# Altium PCB PCB1.PcbDoc
Units mm, origin at the board's own origin, x right, y up, seen from the top; angles counter-clockwise.
Board outline 70 x 80 mm, 2 copper layers (Top Layer, Bottom Layer); 18 components, 21 nets, 217 pads, 2 vias.
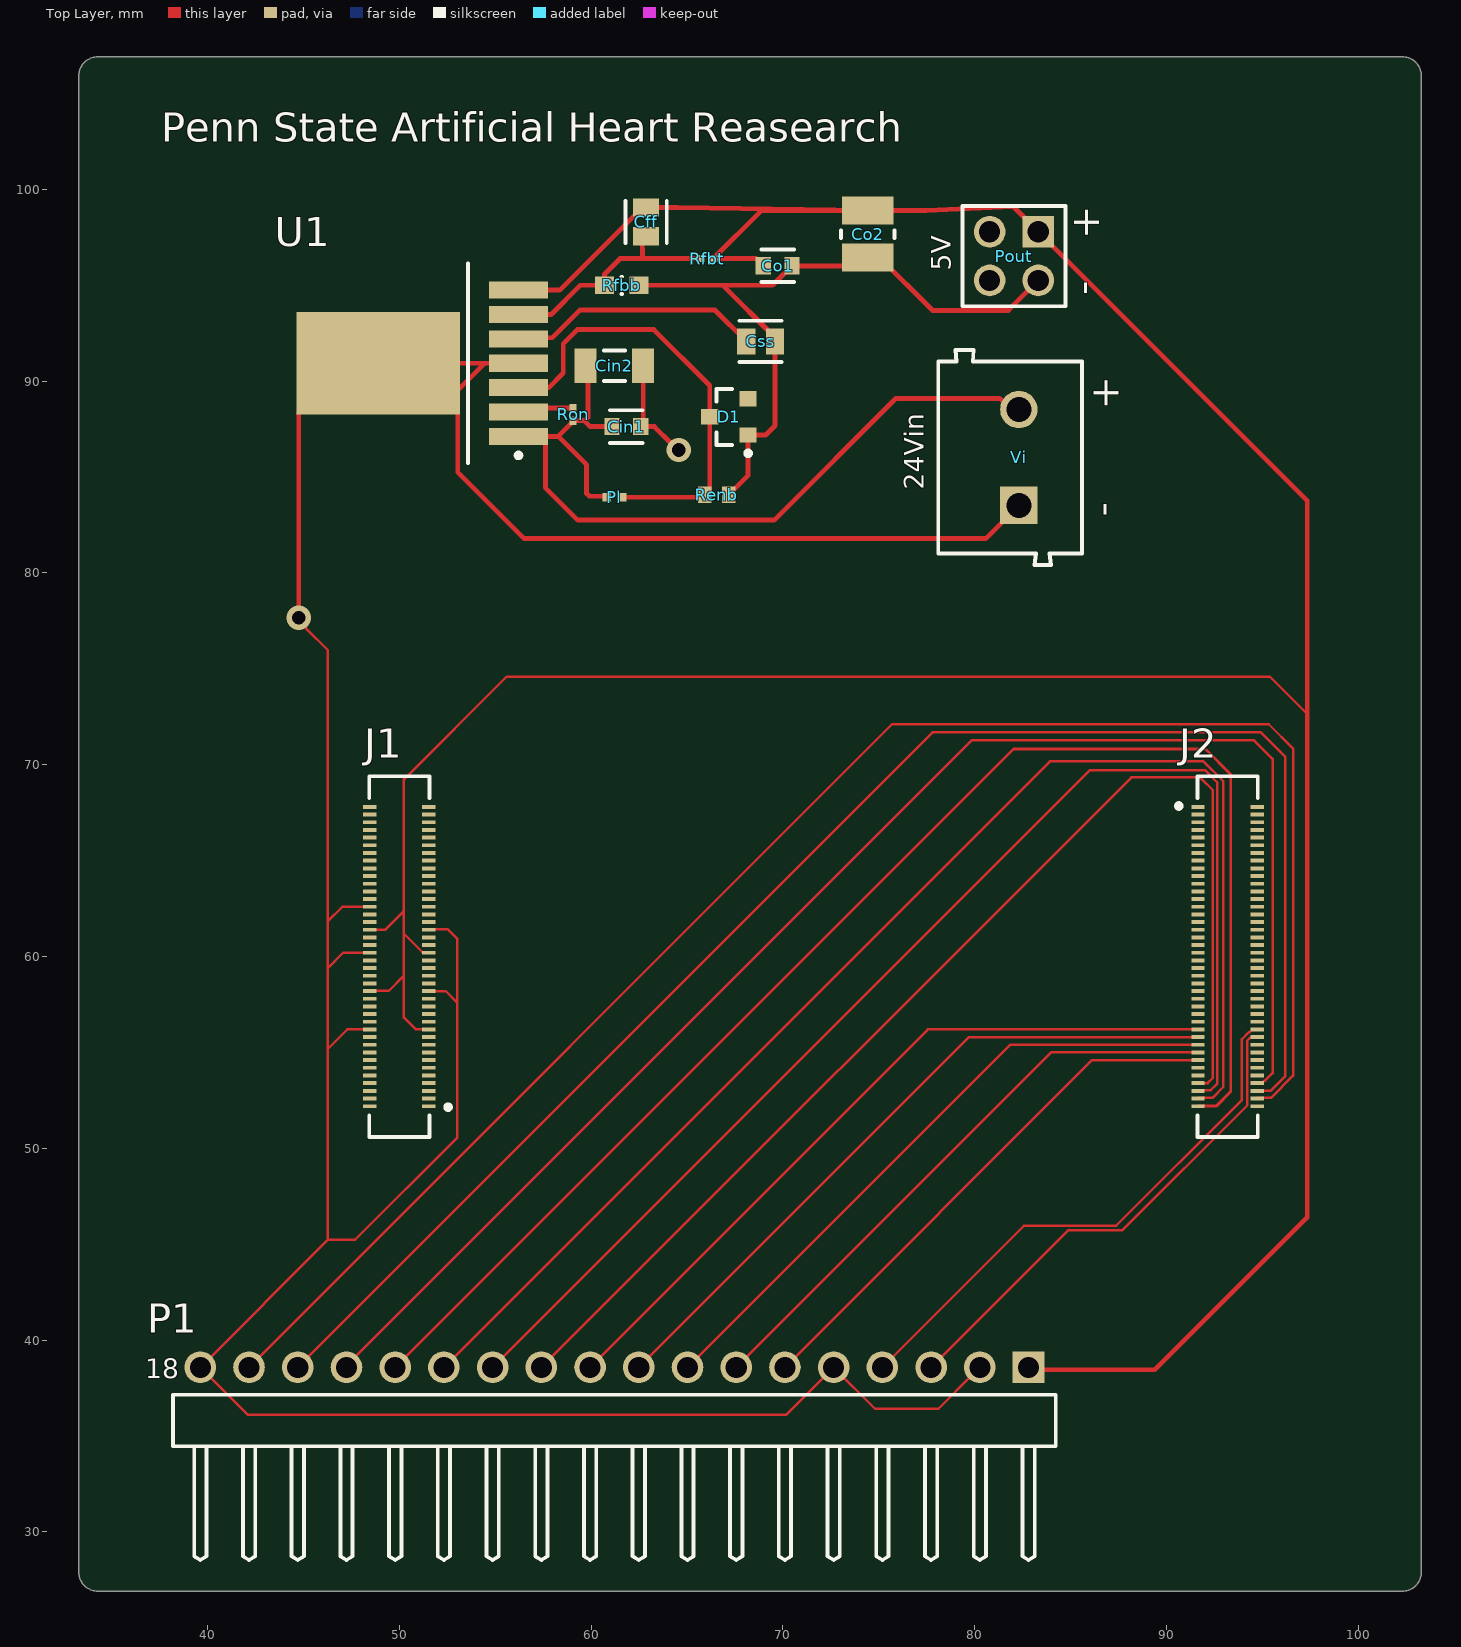
[diagram p0: Top Layer view]
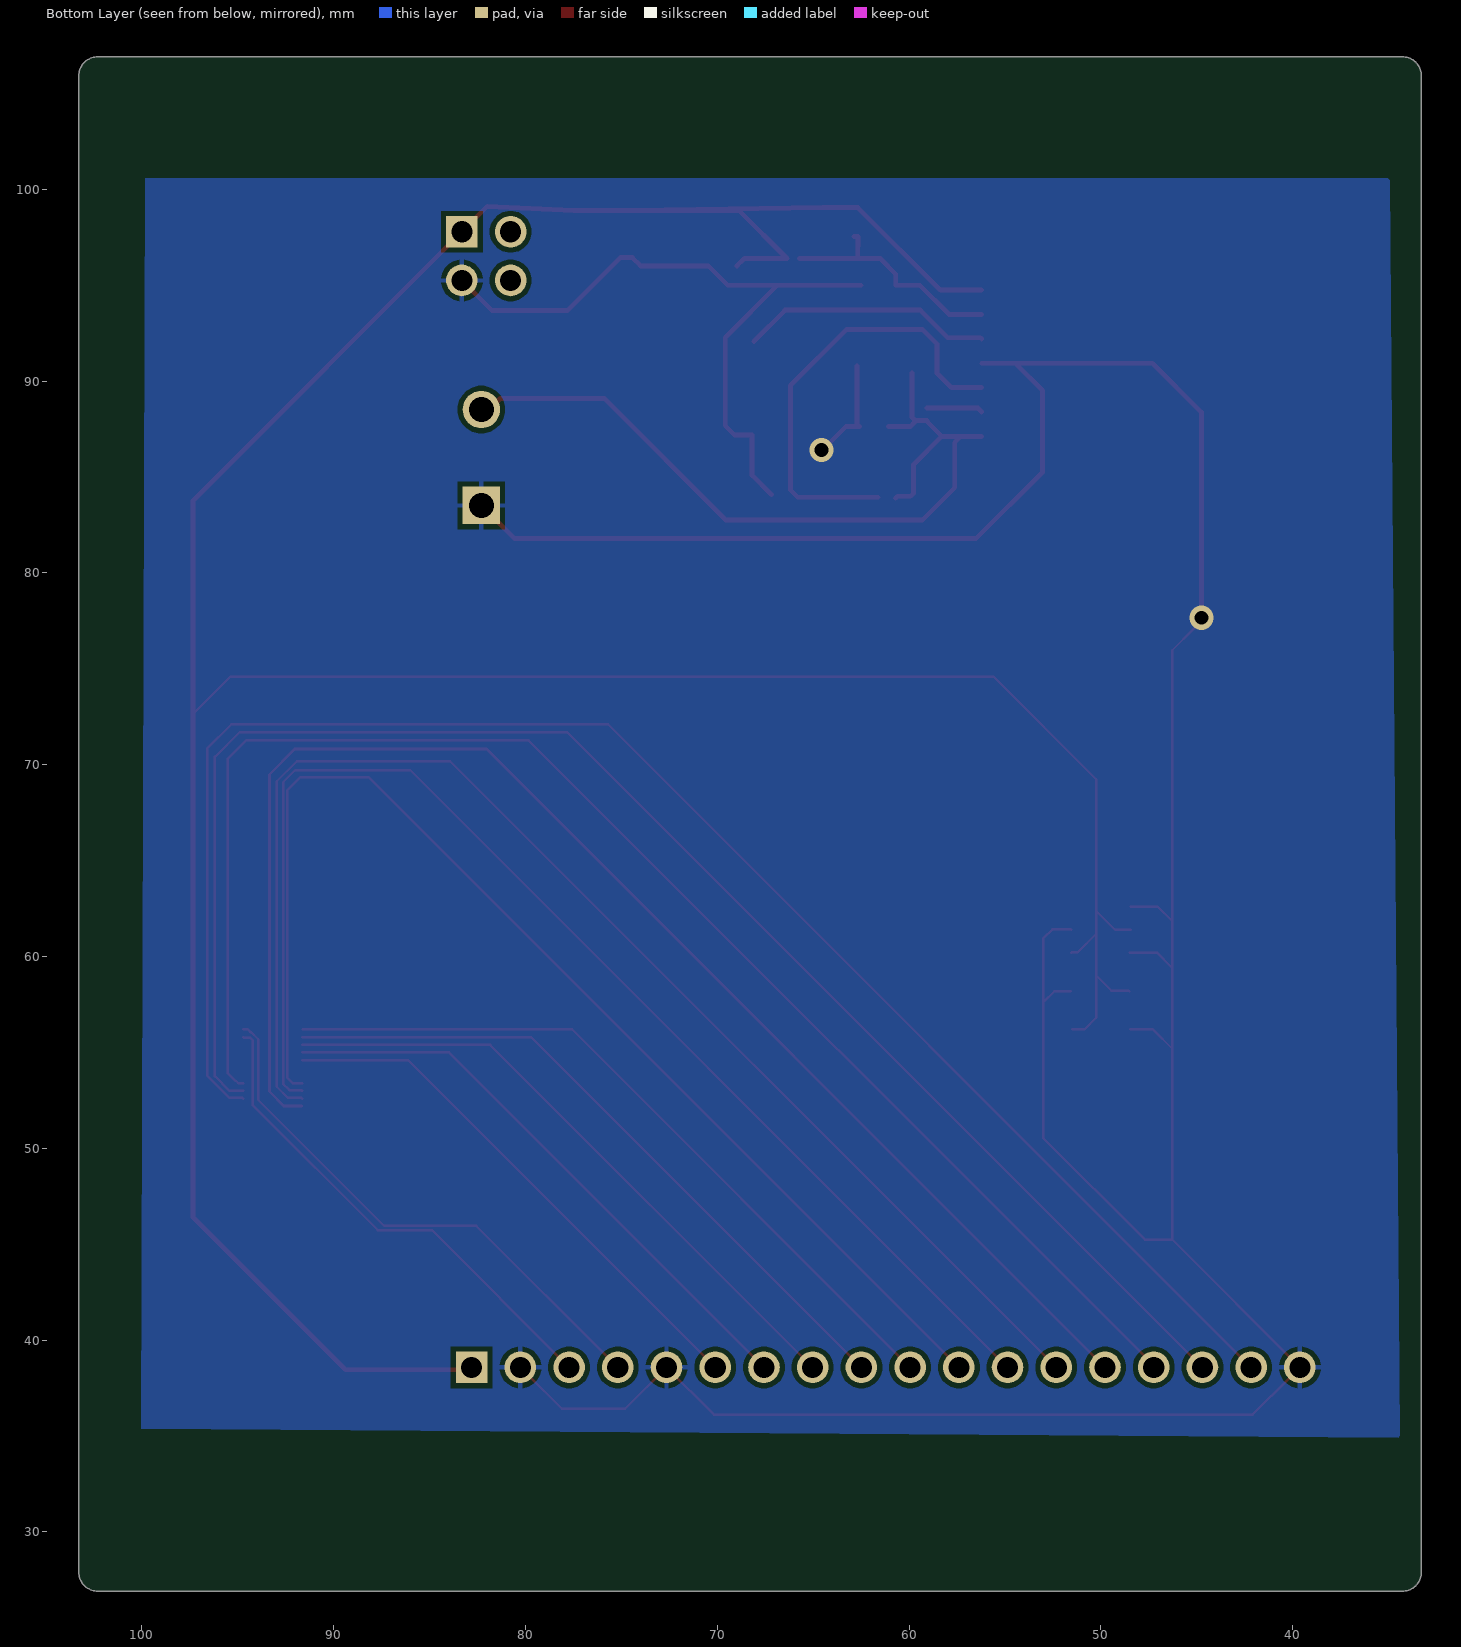
[diagram p1: Bottom Layer view, seen from below]
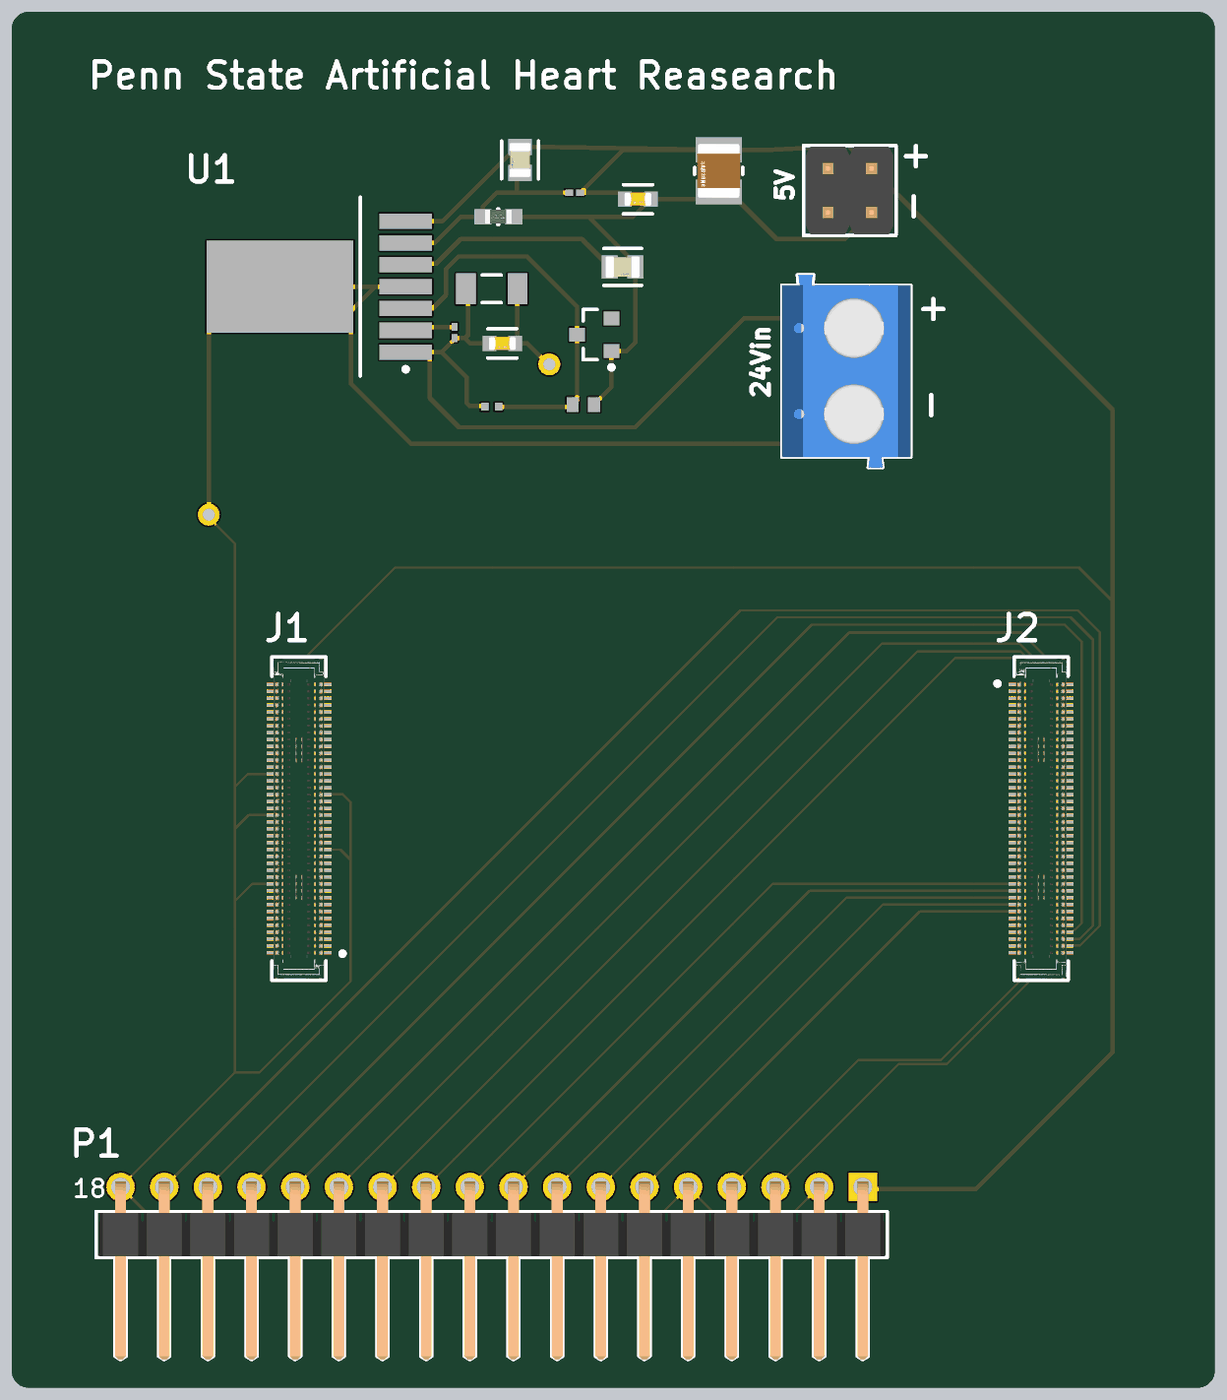
[diagram p2: 3D render of the assembled board from above, using the file's embedded part models]

## Layer stack, top to bottom
Top Solder: solder mask 0.0102, Solder Resist, Dk 3.5
Top Layer: signal copper 0.0356
Dielectric 1: dielectric 0.32, FR-4, Dk 4.8
Bottom Layer: signal copper 0.0356
Bottom Solder: solder mask 0.0102, Solder Resist, Dk 3.5

## Board outline
33.287,27.911 33.287,105.911 cw(c34.287,105.911) 34.287,106.911 102.287,106.911 cw(c102.287,105.911) 103.287,105.911 103.287,27.911 cw(c102.287,27.911) 102.287,26.911 34.287,26.911 cw(c34.287,27.911)

## Design rules (kind name [scope] priority, off if disabled: settings)
Clearance [All] p1: gap=0.254 ignorepadtopadclearanceinfootprint=TRUE except(0: Arc-Hole Track-Hole SMDPad-Hole THPad-Hole Via-Hole Fill-Hole Poly-Hole Region-Hole Text-Hole; 0.099: Arc-Arc Arc-Track Arc-SMDPad Track-Track Track-SMDPad)
ComponentClearance [All] p1: gap=0.099 collisioncheckmode=3 verticalgap=0.099 showdistances=FALSE
HoleToHoleClearance [All] p1: gap=0.099 allowstackedmicrovias=TRUE
MinimumSolderMaskSliver [All] p1: minsoldermaskwidth=0.099
PolygonConnect [All] p1: connectstyle=Relief reliefconductorwidth=0.254 reliefentries=4 polygonreliefangle="90 Angle" airgapwidth=0.254
RoutingVias [All] p1: holewidth=0.711 width=1.27 viastyle="Through Hole" minholewidth=0.711 minwidth=1.27 maxholewidth=0.711 maxwidth=1.27
SilkToSilkClearance [All] p1: silktosilkclearance=0.099
SilkToSolderMaskClearance [IsPad] p1: minsilkscreentomaskgap=0.005 clearancetoexposedcopper=TRUE
SolderMaskExpansion [All] p1: expansion=0.102 istentingtop=FALSE
Width [All] p1: maxlimit=0.254 minlimit=0.13 preferedwidth=0.254 bottomlayer_minwidth=0.254 minimp=50.000000 maximp=50.000000 favimp=50.000000
25 further rules are at their usual default settings.

## Classes and differential pairs
component class RotaryEncoder_connection: J1 J2 P1
component class 5V_power: Cff Cin1 Cin2 Co1 Co2 Css D1 Pl Pout Renb Rfbb Rfbt Ron U1 Vi

## Components (designator, comment, footprint, x,y, rotation, side; value= is the part's Value field where it differs from the comment)
Cff "C0805C223K5RACTU" FP-C0805C-DN-MFG 62.865,98.298 r90 top value=22nF
Cin1 "CC0603KRX7R5BB105" FP-CC0603-DA-MFG 61.837,87.63 r0 top value="1 uF"
Cin2 "CAP 10uF 25V 1206(3216)" CAPC1206(3216)190_N 61.214,90.805 r180 top value=10uF
Co1 "CC0603KRX7R5BB105" FP-CC0603-DA-MFG 69.723,96.012 r0 top value="1 uF"
Co2 "CL32A107MQVNNNE" FP-CL32-IPC_C 74.422,97.663 r270 top
Css "C0805C223K5RACTU" FP-C0805C-DN-MFG 68.834,92.075 r180 top value=22nF
D1 "MMBZ5231BLT1G" ONSC-SOT-23-3-318-08_V 67.183,88.138 r180 top
J1 "DF40HC(4.0)-80DS-0.4V(51)" FP-DF40HC_4_0_-80DS-0_4V-MFG 50,60 r90 top locked
J2 "DF40HC(4.0)-80DS-0.4V(51)" FP-DF40HC_4_0_-80DS-0_4V-MFG 93.18,60 r270 top
P1 "61301811021" 61301811021 61.214,35.814 r0 top
Pl "ERJ-2GEJ683X" RESC1005X40X25LL05T05 61.214,83.947 r180 top
Pout "61300421121" 61300421121 82.042,96.52 r180 top
Renb "ERJ-3EKF1182V" RESC1608X55X30LL15T15 66.548,84.074 r180 top
Rfbb "RP73PF1J1K07BTDF" FP-RP73P-1J-MFG 61.595,94.996 r0 top value=1.07KΩ
Rfbt "CRCW02015K62FNED" RESC0603X28X15NL05T05 66.04,96.393 r0 top
Ron "CRCW0201100KJNED" RESC0603X28X15NL05T05 59.055,88.265 r90 top
U1 "LMZ14203EXTTZE/NOPB" TZA07A_V 51.181,90.932 r180 top
Vi "691102710002" 691102710002 81.846,86.019 r90 top

## Footprints (in the part's own frame and the unit in brackets; to place one, negate y for a bottom-side part, rotate by r counter-clockwise, add the part's x,y. Pads: shape width x height; smd on the part's side, far side on the other; paste and mask are expansions set on the pad)
61300421121 [mm] "Pin Header, pitch 2.54 mm, THT, Vertical, dual row, 4p"
  rect 1.65x1.65 hole 1.1: 1(-1.27,-1.27)
  round 1.65 hole 1.1: 2(-1.27,1.27) 3(1.27,-1.27) 4(1.27,1.27)
  silkscreen extent -2.69,-2.61 2.69,2.61, body extent -2.54,-2.54 2.54,2.54, height 8.59
61301811021 [mm] "Pin Header, pitch 2.54 mm, THT, Angled, single row, 18p"
  rect 1.65x1.65 hole 1.1: 1(21.59,2.77)
  round 1.65 hole 1.1: 2(19.05,2.77) 3(16.51,2.77) 4(13.97,2.77) 5(11.43,2.77) 6(8.89,2.77) 7(6.35,2.77) 8(3.81,2.77) 9(1.27,2.77) 10(-1.27,2.77) 11(-3.81,2.77) 12(-6.35,2.77) 13(-8.89,2.77) 14(-11.43,2.77) 15(-13.97,2.77) 16(-16.51,2.77) 17(-19.05,2.77) 18(-21.59,2.77)
  silkscreen extent -23.01,-7.27 23.01,1.34, body extent -22.86,-7.27 22.86,3.09, height 2.58
691102710002 [mm] "5,00mm - modular - blue - Horizontal entry with pressure clamp - 9,9 mm height - 02p"
  rect 1.95x1.95 hole 1.3: 1(-2.5,-0.45)
  round 1.95 hole 1.3: 2(2.5,-0.45)
  silkscreen extent -5.6,-3.75 5.6,3.75, body extent -5.6,-3.75 5.6,3.75, height 9.96
CAPC1206(3216)190_N [mm] "Chip Capacitor, Body 3.2x1.6mm, Height 1.9mm, IPC Medium Density"
  rect 1.15x1.8 smd: 1(-1.5,0) 2(1.5,0)
  silkscreen extent -0.55,-0.8 0.55,0.8, body extent -1.7,-0.9 1.7,0.9, height 1.9
FP-C0805C-DN-MFG [mm]
  rect 0.95x1.35 smd paste+0 mask+0: 1(-0.75,0) 2(0.75,0)
  silkscreen extent -1.1,-1.07 1.1,1.07, body extent -1.4,-0.85 1.4,0.85, height 0.25
FP-CC0603-DA-MFG [mm]
  rect 0.8x0.9 smd paste+0 mask+0: 1(-0.75,0) 2(0.75,0)
  silkscreen extent -0.85,-0.85 0.85,0.85, body extent -1.35,-0.75 1.35,0.75, height 0.25
FP-CL32-IPC_C [mm]
  rect 1.453x2.704 smd paste+0 mask+0: 1(-1.225,0) 2(1.225,0)
  silkscreen extent -0.2,-1.4 0.2,1.4, body extent -2.05,-1.5 2.05,1.5, height 0.25
FP-DF40HC_4_0_-80DS-0_4V-MFG [mm]
  rect 0.2x0.7 smd paste-1000 mask+0: 1(-7.8,-1.54) 2(-7.8,1.54) 3(-7.4,-1.54) 4(-7.4,1.54) 5(-7,-1.54) 6(-7,1.54) 7(-6.6,-1.54) 8(-6.6,1.54) 9(-6.2,-1.54) 10(-6.2,1.54) 11(-5.8,-1.54) 12(-5.8,1.54) 13(-5.4,-1.54) 14(-5.4,1.54) 15(-5,-1.54) 16(-5,1.54) 17(-4.6,-1.54) 18(-4.6,1.54) 19(-4.2,-1.54) 20(-4.2,1.54) 21(-3.8,-1.54) 22(-3.8,1.54) 23(-3.4,-1.54) 24(-3.4,1.54) 25(-3,-1.54) 26(-3,1.54) 27(-2.6,-1.54) 28(-2.6,1.54) 29(-2.2,-1.54) 30(-2.2,1.54) 31(-1.8,-1.54) 32(-1.8,1.54) 33(-1.4,-1.54) 34(-1.4,1.54) 35(-1,-1.54) 36(-1,1.54) 37(-0.6,-1.54) 38(-0.6,1.54) 39(-0.2,-1.54) 40(-0.2,1.54) 41(0.2,-1.54) 42(0.2,1.54) 43(0.6,-1.54) 44(0.6,1.54) 45(1,-1.54) 46(1,1.54) 47(1.4,-1.54) 48(1.4,1.54) 49(1.8,-1.54) 50(1.8,1.54) 51(2.2,-1.54) 52(2.2,1.54) 53(2.6,-1.54) 54(2.6,1.54) 55(3,-1.54) 56(3,1.54) 57(3.4,-1.54) 58(3.4,1.54) 59(3.8,-1.54) 60(3.8,1.54) 61(4.2,-1.54) 62(4.2,1.54) 63(4.6,-1.54) 64(4.6,1.54) 65(5,-1.54) 66(5,1.54) 67(5.4,-1.54) 68(5.4,1.54) 69(5.8,-1.54) 70(5.8,1.54) 71(6.2,-1.54) 72(6.2,1.54) 73(6.6,-1.54) 74(6.6,1.54) 75(7,-1.54) 76(7,1.54) 77(7.4,-1.54) 78(7.4,1.54) 79(7.8,-1.54) 80(7.8,1.54)
  silkscreen extent -9.4,-2.67 9.4,1.57, body extent -9.5,-1.99 9.5,1.99, height 0.25
FP-RP73P-1J-MFG [mm]
  rect 1x0.9 smd paste+0 mask+0: 1(-0.9,0) 2(0.9,0)
  silkscreen extent -0.02,-0.45 0.02,0.45, body extent -1.5,-0.55 1.5,0.55, height 0.25
ONSC-SOT-23-3-318-08_V [mm] "SOT23, 3-Leads, Body 2.92x1.3mm, Pitch 0.95mm"
  rect 0.9x0.8 smd: 1(-1,0.95) 2(-1,-0.95) 3(1,0)
  silkscreen extent -1.13,-1.46 0.65,2.02, body extent -0.65,-1.46 0.65,1.46, height 1.11
RESC0603X28X15NL05T05 [mm] "Chip Resistor, 2-Leads, Body 0.60x0.30mm, IPC Medium Density"
  rect 0.45x0.35 smd: 1(-0.325,0) 2(0.325,0)
  body extent -0.33,-0.17 0.33,0.18, height 0.28
RESC1005X40X25LL05T05 [mm] "Chip Resistor, 2-Leads, Body 1.00x0.50mm, IPC High Density"
  rect 0.45x0.45 smd: 1(-0.4,0) 2(0.4,0)
  body extent -0.53,-0.27 0.53,0.28, height 0.4
RESC1608X55X30LL15T15 [mm] "Chip Resistor, 2-Leads, Body 1.60x0.80mm, IPC High Density"
  rect 0.7x0.85 smd: 1(-0.625,0) 2(0.625,0)
  body extent -0.87,-0.48 0.87,0.48, height 0.55
TZA07A_V [mm] "D2-PAK, 8-Leads, Body 9.9x10.2mm, Pitch 1.27mm, Lead Span 13.8mm, NSC Recommended"
  rect 3.06x0.89 smd: 1(-5.03,3.81) 2(-5.03,2.54) 3(-5.03,1.27) 4(-5.03,0) 5(-5.03,-1.27) 6(-5.03,-2.54) 7(-5.03,-3.81)
  rect 8.54x5.35 smd: 8(2.281,0)
  silkscreen extent -5.16,-5.2 -2.39,5.2, body extent -2.3,-5.2 7.8,5.2, height 4.67

## Part data
Cff Css: library part CMP-001-00062-3, "Chip Capacitor, 22nF +/-20%, 10V, 0402, Thickness 0.6 mm", Case/Package=0402, Max Operating Temperature=85°C, Min Operating Temperature=-55°C, Tolerance=10%, Voltage Rating=10V, Mounting Technology=SMT, Pins=2
Cin1 Co1: library part CMP-03422-000406-1, "0603 1 uF 6.3 V ±10 % Tolerance X7R SMT Multilayer Ceramic Capacitor", Capacitance="1 uF", Manufacturer=YAGEO, Package=CC0603-DA, Temperature="-55°C to +125°C", Temperature Characteristic=X7R, Temperature Coefficient=15%, Temperature Range High=+125°C, Temperature Range Low=-55°C, Tolerance=0.1, Voltage="6.3 V", Automotive=No, Category=Cap, ComponentLink2Description=Datasheet, ComponentLink2URL=http://www.yageo.com/documents/recent/UPY-GPHC_X7R_6.3V-to-50V_18.pdf, Device Class L1="Passive Components", Device Class L2=Capacitors, Device Class L3="Ceramic Capacitors", Digikey Description="0603 1 uF 6.3 V ±10 % Tolerance X7R SMT Multilayer Ceramic Capacitor", Footprint Url=http://www.yageo.com/exep/pages/download/literatures/UPY-C_GEN_24.pdf, Height=0.9mm, Lead Free=Yes, Manufacturer Part Number=CC0603KRX7R5BB105, Material=Ceramic, Mouser Description="0603 1 uF 6.3 V ±10 % Tolerance X7R SMT Multilayer Ceramic Capacitor", Octopart=https://octopart.com/cc0603krx7r5bb105-yageo-11543596, RoHS=TRUE, Voltage Rating="6.3 V"
Cin2: library part CMP-1037-04981-1, "CAP 10uF 25V -20% to +80% 1206 (3216 Metric) Thickness 1.9mm SMD", Case-EIA=1206, Case-Metric=3216, Rated Voltage="25 V", Tolerance="-20% to +80%", Max Thickness="1.9 mm", Technology=SMT
Co2: library part CMP-13271-001330-1, "CAP CER 100UF 6.3V X5R 1210", Capacitance=100uF, Case Code (Imperial)=1210, Case Code (Metric)=3225, Dielectric=X5R, Max Operating Temperature=85°C, Min Operating Temperature=-55°C, Package Quantity=1, Tolerance=20%, Voltage=6.3V, Case/Package=1210, Contact Plating=Tin, Depth=2.5mm, Height=2.5mm, Lead Free="Lead Free", Length=3.2mm, Material=Ceramic, Mount="Surface Mount", Packaging="Tape and Reel", Radiation Hardening=No, Thickness=0.11inch, Voltage Rating=6.3V, Voltage Rating (DC)=6.3V, Width=0.098inch
D1: library part CMP-1060-00985-1, "Zener Voltage Regulator, 225 mW, 3-Pin SOT-23, Pb-Free, Tape and Reel", Manufacturer="On Semiconductor", ComponentLink1Description="Manufacturer URL", ComponentLink1URL=http://www.onsemi.com/, ComponentLink2Description=Datasheet, ComponentLink2URL=http://www.onsemi.cn/pub_link/Collateral/MMBZ5221BLT1-D.PDF, ComponentLink3Description="Package Specification", ComponentLink3URL=http://www.onsemi.cn/pub_link/Collateral/318-08.PDF, DatasheetVersion="Rev. 12", Mounting Technology="Surface Mount", PackageDescription="3-Pin Small Outline Transistor, Body 2.92 x 1.3 mm, Pitch 0.95 mm", PackageReference=SOT-23-3-318-08, PackageVersion="Rev. AP, 11/2009", Packing="Tape and Reel", PartNumber=MMBZ5231BLT1G, RoHS=Pb-Free, VZ Typ (V)=5.1
J1 J2: library part CMP-11605-000021-1, "CONN RCPT 80POS SMD GOLD", Current Rating=0.3A, Manufacturer=Hirose, Package=0, Temperature="-35°C to +85°C", Temperature Range High=+85°C, Temperature Range Low=-35°C, Voltage Rating=30V, Automotive=No, Category=Conn, ComponentLink2Description=Datasheet, ComponentLink2URL=https://www.hirose.com/product/document?clcode=CL0684-4140-4-51&productname=DF40HC(4.0)-80DS-0.4V(51)&series=DF40&documenttype=SpecSheet&lang=en&documentid=0000428225, Conn Gender=Female, Conn Orientation=Straight, Contact Material=Gold,Nickel, Device Class L1=Connectors, Device Class L2="Board to Board Connectors", Device Class L3=unset, Digikey Description="CONN RCPT 80POS SMD GOLD", Footprint Url=https://www.hirose.com/product/document?clcode=CL0684-4140-4-51&productname=DF40HC(4.0)-80DS-0.4V(51)&series=DF40&documenttype=2DDrawing&lang=en&documentid=0001001442, Height=4.05mm, Is Female=yes, Lead Free=Yes, Manufacturer Part Number=DF40HC(4.0)-80DS-0.4V(51), Mouser Description="Board to Board & Mezzanine Connectors 80P 2 ROW RECEPTACLE 4MM HGHT .4MM PITCH", Number Of Contacts=80, Number Of Rows=2, Octopart=https://octopart.com/df40hc%284.0%29-80ds-0.4v%2851%29-hirose-19677719, Pitch=0.4mm, RoHS=TRUE, Standoff Height=0mm
P1: library part CMP-1502-01098-1, "THT Angled Pin Header WR-PHD, Pitch 2.54 mm, Single Row, 18 pins", Contact Resistance=20mOhm, Manufacturer="Wurth Elektronik", Operating Temperature=-40to105degC, Rated Current=3A, Withstanding Voltage=500VAC, Working Voltage=250VAC, Datasheet URL=https://katalog.we-online.de/em/datasheet/6130xx11021.pdf, Gender=Male, Manufacturer URL=http://www.we-online.de, Mounting Technology=THT, Orientation=Angled, Package Reference=61301811021, Packaging=Bag, Part Number=61301811021, Pin Number=18, Pitch=2.54mm, Publisher=WurthElektronik, Row Number=Single
Pl: library part CMP-2002-00573-1, Manufacturer=Panasonic, Part Number=ERJ-2GEJ683X
Pout: library part CMP-1502-01066-1, "THT Vertical Pin Header WR-PHD, Pitch 2.54 mm, Dual Row, 4 pins", Contact Resistance=20mOhm, Manufacturer="Wurth Elektronik", Operating Temperature=-40to105degC, Rated Current=3A, Withstanding Voltage=500VAC, Working Voltage=250VAC, Datasheet URL=https://katalog.we-online.de/em/datasheet/6130xx21121.pdf, Gender=Male, Manufacturer URL=http://www.we-online.de, Mounting Technology=THT, Orientation=Vertical, Package Reference=61300421121, Packaging=Bag, Part Number=61300421121, Pin Number=4, Pitch=2.54mm, Publisher=WurthElektronik, Row Number=Dual
Renb: library part CMP-2000-00210-1, Manufacturer=Panasonic, Part Number=ERJ-3EKF1182V
Rfbb: library part CMP-03211-001820-1, "RES SMD 1.07K OHM 0.1% 1/6W 0603", Manufacturer="TE Connectivity", Package=RP73P-1J, Power Rating=0.166W, Resistance=1.07KΩ, Temperature="-55°C to +155°C", Temperature Coefficient=25ppm/°C, Temperature Range High=+155°C, Temperature Range Low=-55°C, Tolerance=0.001, Voltage Rating=100V, Automotive=No, Category=Res, ComponentLink2Description=Datasheet, ComponentLink2URL=https://www.te.com/commerce/DocumentDelivery/DDEController?Action=srchrtrv&DocNm=1773272&DocType=DS&DocLang=English, Composition="Thin Film", Device Class L1="Passive Components", Device Class L2=Resistors, Device Class L3="Chip SMD Resistors", Digikey Description="RES SMD 1.07K OHM 0.1% 1/6W 0603", Height=0.55mm, Ipc Land Pattern Name=RESC15580X45, Lead Free=Yes, Manufacturer Part Number=RP73PF1J1K07BTDF, Mouser Description="TE CONNECTIVITY - RP73PF1J1K07BTDF - RES, THIN FILM, 1K07, 0.1%, 0.166W, 0603", Octopart=https://octopart.com/rp73pf1j1k07btdf-te+connectivity-45465727, RoHS=TRUE, Series=RP73P
Rfbt: library part CMP-2004-00748-1, "5.62k", Manufacturer="Vishay Dale", Part Number=CRCW02015K62FNED
Ron: library part CMP-2004-00004-1, "100k", Manufacturer=Vishay, Part Number=CRCW0201100KJNED
U1: library part CMP-0069-00343-2, "3A SIMPLE SWITCHER® Power Module with 42V Maximum Input Voltage for Military and Rugged Applications, 7 pin TO-PMOD", Manufacturer="National Semiconductor", PackageTopMarking=NSUZXYTTE#*LMZ14203*EXT, PowerWise=Y, ComponentLink1Description="Manufacturer URL", ComponentLink1URL=http://www.national.com/, ComponentLink2Description="LMZ14203EXT Datasheet", ComponentLink2URL=http://www.national.com/ds/LM/LMZ14203EXT.pdf, ComponentLink3Description="LMZ14203EXT Web Page", ComponentLink3URL=http://www.national.com/pf/LM/LMZ14203EXT.html, ComponentLink4Description="TZA07A Package Page", ComponentLink4URL=http://www.national.com/packaging/folders/tza07a.html, CompType=Switcher, DatasheetVersion=Aug-2010, High-Reliability=Y, PackageDescription="TO-PMOD-7, 10.16 x 9.85 x 4.57 mm Body, 7 Lead, 1.27mm Pitch, Surface Mount", PackageReference=TZA07A, PackageVersion="revD, Apr-2011", PartNumber=LMZ14203EXTTZE/NOPB, PinCount=7, RevisionNote="Footprint updated according to revison D of 'tza07a.pdf'. Component URLs added", RoHS=Y
Vi: library part CMP-1502-03258-1, "Series 102 - 5.00 mm Horizontal Entry Modular with Pressure Clamp WR-TBL, 2 pin", Manufacturer="Wurth Elektronik", Operating Temperature=-40to105degC, Datasheet URL=http://katalog.we-online.de/em/datasheet/6911027100xx.pdf, Manufacturer URL=http://www.we-online.de, Mounting Technology=THT, Package Reference=691102710002, Packaging=Box, Part Number=691102710002, Pin Number=2, Pitch=5.00mm, Publisher=WurthElektronik

## Via types
v1: diameter 1.27, hole 0.711, Top Layer to Bottom Layer, 2 vias

## Nets (pads, with @x,y where several pads share a name; then routed paths per layer and width w, separated by ;. In a path a pad name is that pad's centre, name@x,y a point inside that pad or via, vN(x,y) a via of type N, cw(c..) or ccw(c..) an arc to the next point about the centre after c; other vN are vias at no path point)
5VCC: Cff.2 Co1.1 Co2.1 J1.21 J1.32 J1.41 J1.48 P1.1 Pout.1 Rfbt.2 U1.7 | length 186.3
  Top Layer w0.13: J1.48@48.438,61.392 49.251,61.392 50.216,62.357 ; J1.32@48.514,58.191 48.539,58.217 49.454,58.217 50.241,59.004 ; J1.21@51.496,56.2 50.861,56.2 50.241,56.82 50.241,59.004 ; J1.41 51.505,60.235 51.195,60.235 50.241,61.189 ; 97.333,72.644 95.377,74.6 55.601,74.6 50.241,69.24 50.241,62.357 50.241,61.189 ; 50.241,59.004 50.241,61.189
  Top Layer w0.254: U1.7 58.359,94.742 62.665,99.048 Cff.2 64.498,99.048 Co2.1 ; Co1.1 68.592,96.393 Rfbt.2 68.86,98.888 Co2.1 ; P1.1@82.829,38.456 89.383,38.456 97.333,46.406 97.333,72.644 97.333,83.769 Pout.1 81.991,99.111 77.47,98.888 Co2.1
D0: J2.62 P1.3 | length 26.1
  Top Layer w0.13: P1.3 84.877,45.737 87.698,45.737 94.206,52.245 94.206,55.623 94.348,55.765 94.685,55.765 J2.62
D1: J2.60 P1.4 | length 28.5
  Top Layer w0.13: P1.4@75.387,38.735 75.387,38.787 82.566,45.966 87.368,45.966 93.929,52.527 93.929,55.691 94.302,56.064 94.334,56.064 94.47,56.2 J2.60
D2: J2.67 P1.6 | length 28.1
  Top Layer w0.13: P1.6@70.129,38.684 70.204,38.684 86.12,54.6 J2.67
D3: J2.65 P1.7 | length 30.9
  Top Layer w0.13: P1.7@67.691,38.481 67.691,38.711 83.98,55 J2.65
D4: J2.63 P1.8 | length 33.5
  Top Layer w0.13: P1.8@65.075,38.659 65.099,38.659 81.84,55.4 J2.63
D5: J2.61 P1.9 | length 36.3
  Top Layer w0.13: P1.9@62.382,38.71 62.61,38.71 79.7,55.8 J2.61
D6: J2.59 P1.10 | length 39
  Top Layer w0.13: P1.10 77.56,56.2 91.608,56.2 J2.59@91.618,56.21
D15: J2.73 P1.11 | length 63.5
  Top Layer w0.13: P1.11@57.709,38.837 57.709,38.889 88.162,69.342 91.745,69.342 92.405,68.682 92.405,53.67 92.135,53.4 J2.73
D16: J2.75 P1.12 | length 67.7
  Top Layer w0.13: P1.12@54.966,38.684 54.966,38.686 86.003,69.723 91.999,69.723 92.634,69.088 92.634,53.366 92.303,53.035 91.675,53.035 J2.75
D17: J2.77 P1.13 | length 71.6
  Top Layer w0.13: P1.13@52.375,38.635 83.92,70.18 91.923,70.18 92.964,69.139 92.964,53.213 92.386,52.635 91.675,52.635 J2.77
D18: J2.79 P1.14 | length 75.9
  Top Layer w0.15: P1.14@49.835,38.786 49.986,38.786 82.015,70.815 92.024,70.815 93.345,69.494 93.345,52.959 92.586,52.2 J2.79
D19: J2.74 P1.15 | length 79.4
  Top Layer w0.13: P1.15@47.295,39.014 47.574,39.014 79.832,71.272 94.564,71.272 95.529,70.307 95.529,53.927 95.138,53.536 95.106,53.536 94.97,53.4 J2.74
D20: J2.76 P1.16 | length 84
  Top Layer w0.13: P1.16@44.729,38.887 45.007,38.887 77.824,71.704 94.894,71.704 96.19,70.409 96.19,53.772 95.418,53 J2.76
D21: J2.78 P1.17 | length 88.3
  Top Layer w0.13: P1.17 75.691,72.111 95.326,72.111 96.596,70.841 96.596,53.797 95.434,52.635 94.755,52.635 J2.78
GND: Cin1.2 Cin2.1 Co1.2 Co2.2 Css.1 D1.1 J1.22 J1.31 J1.42 J1.47 J1.54 P1.2 P1.5 P1.18 Pout.2 Renb.1 Rfbb.2 U1.4 U1.8 Vi.1 | length 217.8
  Top Layer w0.13: P1.18 46.279,45.239 ; P1.18@40.132,38.278 40.12,38.266 40.12,38.088 42.089,36.119 70.179,36.119 P1.5 74.804,36.424 78.104,36.424 79.856,38.176 P1.2@79.883,38.176 ; 45.136,77.114 46.279,75.971 46.279,61.849 ; 46.304,59.436 47.075,60.207 J1.42@48.485,60.207 ; J1.54@48.435,62.594 47.024,62.594 46.279,61.849 ; J1.22 47.285,56.2 46.279,55.194 ; J1.47 51.557,61.417 52.527,61.417 53.01,60.935 53.01,57.607 ; J1.31@51.562,58.191 52.426,58.191 53.01,57.607 ; 46.279,45.239 47.703,45.239 53.01,50.546 53.01,57.607 ; 46.279,45.239 46.279,55.194 ; 46.279,55.194 46.279,59.436 46.279,61.849
  Top Layer w0.254: v1@44.856,78.13 44.77,78.13 44.757,78.143 44.757,88.384 47.305,90.932 U1.8 54.458,90.932 ; U1.4 54.458,90.932 ; Rfbb.2 66.863,94.996 ; Cin2.1 62.714,87.757 Cin1.2 63.297,87.63 v1@64.135,86.792 ; Renb.1 68.183,85.084 D1.1 69.088,87.188 69.584,87.684 Css.1 69.584,92.275 66.863,94.996 ; Vi.1 80.565,81.788 56.515,81.788 53.043,85.26 53.043,89.518 54.458,90.932 ; Pout.2 81.753,93.691 79.893,93.691 77.794,93.691 75.048,96.438 Co2.2 73.996,96.012 Co1.2 69.457,94.996 66.863,94.996
  other v1: 44.755,77.673 64.567,86.411
NetCff_1: Cff.1 Rfbb.1 Rfbt.1 U1.6 | length 12.4
  Top Layer w0.254: U1.6 57.912,93.472 59.436,94.996 Rfbb.1 60.695,95.578 61.51,96.393 62.674,96.393 ; Cff.1 62.665,97.548 62.665,97.546 62.674,96.393 ; Rfbt.1 62.674,96.393
NetCin1_1: Cin1.1 Cin2.2 Pl.2 Ron.1 U1.1 Vi.2 | length 43.6
  Top Layer w0.254: U1.1 U1.1@57.296,87.122 ; Ron.1@59.055,87.884 59.049,87.884 58.287,87.122 ; Ron.1 59.67,87.94 59.842,88.113 Cin2.2@59.842,90.424 ; 59.665,87.909 59.944,87.63 Cin1.1 ; Pl.2@60.706,83.896 60.604,83.998 59.915,83.998 59.766,84.147 59.766,85.643 58.287,87.122 ; Vi.2 81.883,88.519 81.299,89.103 75.895,89.103 69.545,82.753 59.309,82.753 57.614,84.448 57.614,86.804 U1.1@57.296,87.122 ; U1.1@57.296,87.122 58.287,87.122
NetCss_2: Css.2 U1.5 | length 13.2
  Top Layer w0.254: U1.5 56.272,92.263 57.973,92.263 59.411,93.701 66.458,93.701 Css.2
NetD1_3: D1.3 Pl.1 Renb.2 U1.3 | length 23.5
  Top Layer w0.254: U1.3 57.785,89.662 58.547,90.424 58.547,91.948 59.284,92.685 63.271,92.685 66.183,89.773 D1.3 66.183,84.334 Renb.2 65.796,83.947 Pl.1
NetRon_2: Ron.2 U1.2 | length 2.9
  Top Layer w0.254: U1.2 56.409,88.59 Ron.2
pads on no net: D1.2 J1.1 J1.2 J1.3 J1.4 J1.5 J1.6 J1.7 J1.8 J1.9 J1.10 J1.11 J1.12 J1.13 J1.14 J1.15 J1.16 J1.17 J1.18 J1.19 J1.20 J1.23 J1.24 J1.25 J1.26 J1.27 J1.28 J1.29 J1.30 J1.33 J1.34 J1.35 J1.36 J1.37 J1.38 J1.39 J1.40 J1.43 J1.44 J1.45 J1.46 J1.49 J1.50 J1.51 J1.52 J1.53 J1.55 J1.56 J1.57 J1.58 J1.59 J1.60 J1.61 J1.62 J1.63 J1.64 J1.65 J1.66 J1.67 J1.68 J1.69 J1.70 J1.71 J1.72 J1.73 J1.74 J1.75 J1.76 J1.77 J1.78 J1.79 J1.80 J2.1 J2.2 J2.3 J2.4 J2.5 J2.6 J2.7 J2.8 J2.9 J2.10 J2.11 J2.12 J2.13 J2.14 J2.15 J2.16 J2.17 J2.18 J2.19 J2.20 J2.21 J2.22 J2.23 J2.24 J2.25 J2.26 J2.27 J2.28 J2.29 J2.30 J2.31 J2.32 J2.33 J2.34 J2.35 J2.36 J2.37 J2.38 J2.39 J2.40 J2.41 J2.42 J2.43 J2.44 J2.45 J2.46 J2.47 J2.48 J2.49 J2.50 J2.51 J2.52 J2.53 J2.54 J2.55 J2.56 J2.57 J2.58 J2.64 J2.66 J2.68 J2.69 J2.70 J2.71 J2.72 J2.80 Pout.3 Pout.4

## Polygon pours and split planes (outlines as drawn)
GND on Bottom Layer "GND_L02_P000" (solid, pour order 0): 34.929,100.461 35.052,100.584 99.822,100.584 100.016,35.373 34.417,34.925

## Silkscreen, mask and mechanical layers (free items; w line width, h text height)
Top Overlay:
  text "Penn State Artificial Heart Reasearch" at 37.592,102.489 h1.52
  text "+" at 86.487,97.409 h1.52 r90
  text "5V" at 78.74,95.758 h1 r90
  text "-" at 86.36,94.488 h1.52 r90
  text "+" at 87.503,88.519 h1.52 r90
  text "24Vin" at 77.343,84.328 h1 r90
  text "-" at 87.376,82.931 h1.52 r90
Mechanical 1:
  circle w0.013: c99.513,50.22 r1.125
  circle w0.013: c99.513,71.12 r1.125
  circle w0.013: c37.973,71.12 r1.125
  circle w0.013: c37.973,50.22 r1.125
  lines w0.013: 33.287,27.911 ccw(c34.287,27.911) 34.287,26.911 102.287,26.911 ccw(c102.287,27.911) 103.287,27.911 103.287,105.911 ccw(c102.287,105.911) 102.287,106.911 34.287,106.911 ccw(c34.287,105.911) 33.287,105.911 33.287,27.911 ; 35.723,50.22 ccw(c37.973,50.22) 37.973,47.97 99.513,47.97 ccw(c99.513,50.22) 101.763,50.22 101.763,71.12 ccw(c99.513,71.12) 99.513,73.37 37.973,73.37 ccw(c37.973,71.12) 35.723,71.12 35.723,50.22
Top Designator:
  text "USB C" at 38.989,57.912 h1.52 r90

## Text inside footprints (layer, text, board x,y; h text height)
P1: Top Overlay "18" at 36.754,38.014 h1.02